# Altium PCB CanRadar_v1.PcbDoc
Units mil, origin at the board's own origin, x right, y up, seen from the top; angles counter-clockwise.
Board outline 3937.01 x 3937.01 mil, 2 copper layers (Top Layer, Bottom Layer); 50 components, 31 nets, 139 pads, 0 vias.
Unrouted connection lines stored in the file: 104.
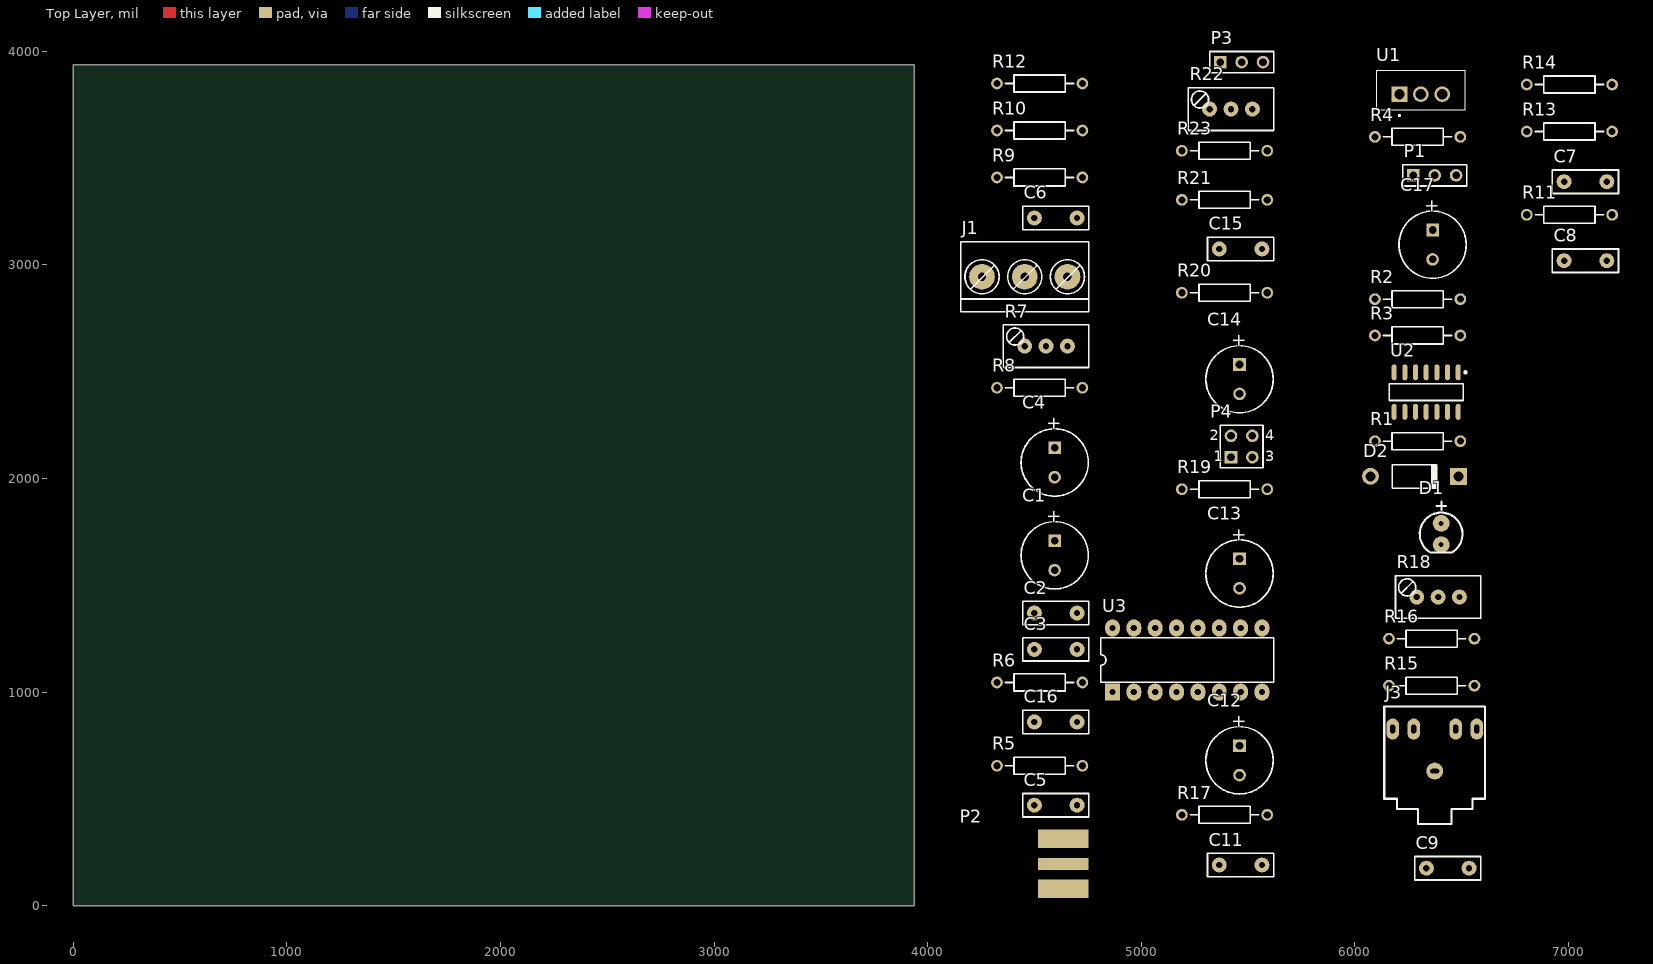
[diagram p0: Top Layer view]
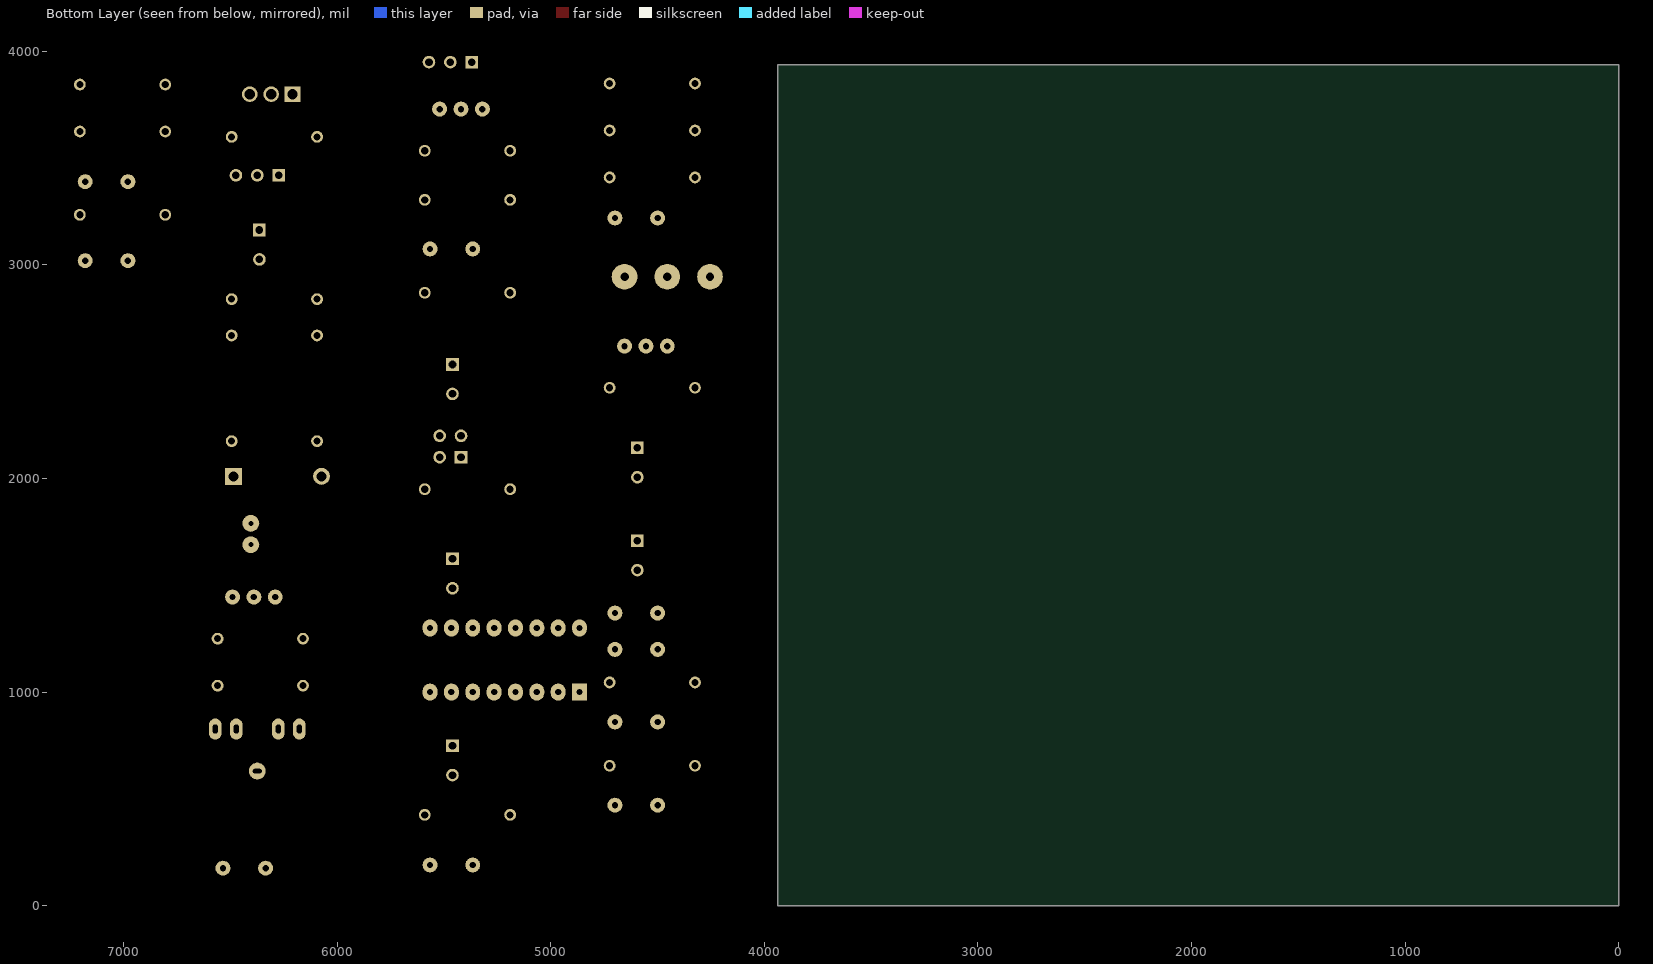
[diagram p1: Bottom Layer view, seen from below]

## Layer stack, top to bottom
Top Solder: solder mask 0.4, Solder Resist, Dk 3.5
Top Layer: signal copper 1.4
Dielectric 1: dielectric 12.6, FR-4, Dk 4.8
Bottom Layer: signal copper 1.4
Bottom Solder: solder mask 0.4, Solder Resist, Dk 3.5

## Board outline
0,0 3937.01,0 3937.01,3937.01 0,3937.01

## Design rules (kind name [scope] priority, off if disabled: settings)
Clearance [All] p1: gap=10 ignorepadtopadclearanceinfootprint=FALSE except(0: Arc-Hole Track-Hole SMDPad-Hole THPad-Hole Via-Hole Fill-Hole Poly-Hole Region-Hole Text-Hole)
PolygonConnect [All] p1: connectstyle=Relief reliefconductorwidth=10 reliefentries=4 polygonreliefangle="90 Angle" airgapwidth=10
RoomDefinition CanRadar_v1 [InComponentClass('CanRadar_v1')] p1: confinementstyle=ConfineIn formatcopy=TRUE lockcomponents=FALSE outline 4130,20 7250,20 7250,4015 4130,4015
RoutingVias [All] p1: holewidth=28 width=50 viastyle="Through Hole" minholewidth=28 minwidth=50 maxholewidth=28 maxwidth=50
SolderMaskExpansion [All] p1: expansion=4
Width [All] p1: maxlimit=10 minlimit=10 preferedwidth=10
30 further rules are at their usual default settings.

## Components (designator, comment, footprint, x,y, rotation, side; value= is the part's Value field where it differs from the comment)
C1 "Cap2" CAPPR3.5-8x11.5 4595,1640 r270 top value=10uF
C2 "Cap" RAD-0.2 4500,1370 r0 top value=100nF
C3 "Cap" RAD-0.2 4500,1200 r0 top value=10nF
C4 "Cap2" CAPPR3.5-8x11.5 4595,2075 r270 top value=1uF
C5 "Cap" RAD-0.2 4500,470 r0 top value=100nF
C6 "Cap" RAD-0.2 4500,3220 r0 top value=1nF
C7 "Cap" RAD-0.2 6980.9,3390 r0 top value=1nF
C8 "Cap" RAD-0.2 6980.9,3020 r0 top value=1nF
C9 "Cap" RAD-0.2 6335.9,175 r0 top value=1nF
C11 "Cap" RAD-0.2 5365.9,190 r0 top value=100nF
C12 "Cap2" CAPPR3.5-8x11.5 5460.9,680 r270 top value=10uF
C13 "Cap2" CAPPR3.5-8x11.5 5460.9,1555 r270 top value=1uF
C14 "Cap2" CAPPR3.5-8x11.5 5460.9,2465 r270 top value=10uF
C15 "Cap" RAD-0.2 5365.9,3075 r0 top value=470nF
C16 "Cap" RAD-0.2 4500,860 r0 top value=100nF
C17 "Cap2" CAPPR3.5-8x11.5 6365,3095 r270 top value=10uF
D1 "LED1" LED 6405,1790 r270 top
D2 "Diode 1N4001" DO-41 6280,2010 r0 top
J1 "Borne x 3" BORNE-3x0.2 4455,2945 r0 top
J3 "SJ1-3535N" "3.5mm Jack" 6375,630 r270 top
P1 "Header 3" HDR1X3 6275,3420 r0 top
P2 "SMA PCB 0.8mm" "SMA PCB 0.8mm" 4635,195 r0 top
P3 "Header 3" HDR1X3 5370.9,3950 r0 top
P4 "Header 2X2" HDR2X2 5420.9,2100 r0 top
R1 "Res2" AXIAL-0.4 6295,2175 r0 top value=1K
R2 "Res2" AXIAL-0.4 6295,2840 r0 top value=12K
R3 "Res2" AXIAL-0.4 6295,2670 r0 top value=1K
R4 "Res2" AXIAL-0.4 6295,3600 r0 top value=10K
R5 "Res2" AXIAL-0.4 4525,655 r0 top value=1.5K
R6 "Res2" AXIAL-0.4 4525,1045 r0 top value=1K
R7 "RPot" TRIMMER-V 4555,2620 r0 top value=10K
R8 "Res2" AXIAL-0.4 4525,2425 r0 top value=220
R9 "Res2" AXIAL-0.4 4525,3410 r0 top value=18K
R10 "Res2" AXIAL-0.4 4525,3630 r0 top value=3.9K
R11 "Res2" AXIAL-0.4 7005.9,3235 r0 top value=27K
R12 "Res2" AXIAL-0.4 4525,3850 r0 top value=100K
R13 "Res2" AXIAL-0.4 7005.9,3625 r0 top value=6.8K
R14 "Res2" AXIAL-0.4 7005.9,3845 r0 top value=8.2K
R15 "Res2" AXIAL-0.4 6360.9,1030 r0 top value=47K
R16 "Res2" AXIAL-0.4 6360.9,1250 r0 top value=5.1K
R17 "Res2" AXIAL-0.4 5390.9,425 r0 top value=5.1K
R18 "RPot" TRIMMER-V 6390.9,1445 r0 top value=50K
R19 "Res2" AXIAL-0.4 5390.9,1950 r0 top value=100K
R20 "Res2" AXIAL-0.4 5390.9,2870 r0 top value=100K
R21 "Res2" AXIAL-0.4 5390.9,3305 r0 top value=1K
R22 "RPot" TRIMMER-V 5420.9,3730 r0 top value=2M
R23 "Res2" AXIAL-0.4 5390.9,3535 r0 top value=10K
U1 "LM2940CT-5.0" TO254P1054X470X1955-3 6310,3800 r0 top
U2 "MAX414CPD" NSO14_L 6335,2405 r270 top
U3 "XR2206/11/12EB" DIP-16 4865.9,1000 r0 top

## Footprints (in the part's own frame and the unit in brackets; to place one, negate y for a bottom-side part, rotate by r counter-clockwise, add the part's x,y. Pads: shape width x height; smd on the part's side, far side on the other; paste and mask are expansions set on the pad)
"3.5mm Jack" [mm] "stereo jack 3.5mm"
  round 2 hole 0.5 slot 1.05 at 90 deg: 1(0,0)
  oval 2.5x1.5 hole 0.6 slot 1.05 at 0 deg: 2(-5,5) 3(-5,2.5) 4(-5,-2.5) 5(-5,-5)
  silkscreen extent -7.7,-6 6.3,6, body extent -7.45,-5.98 6.55,6.02, height 6.5
AXIAL-0.4 [mm]
  round 1.4 hole 0.85: 1(-5.08,0) 2(5.08,0)
  silkscreen extent -4.06,-1.02 4.06,1.02
BORNE-3x0.2 [mil] "Triple borne para circuito impreso a tornillo, Pitch: 200mil (5.08mm), Largo cuerpo: 327mil (8.3mm)"
  round 120 hole 39.37: 1(-200,0) 2(0,0) 3(200,0)
  silkscreen extent -300,-164 300,164
CAPPR3.5-8x11.5 [mm]
  rect 1.5x1.5 hole 0.9: 1(-1.75,0)
  round 1.5 hole 0.9: 2(1.75,0)
  silkscreen extent -4,-4 4,4
DIP-16 [mil] "Dual In-line Package, 16 pines, Ancho cuerpo: 300mil (7.62 mm),  Pitch: 100mil (2.54 mm)"
  rect 70x80 hole 29.53: 1(0,0)
  oval 70x80 hole 29.53: 2(100,0) 3(200,0) 4(300,0) 5(400,0) 6(500,0) 7(600,0) 8(700,0) 9(700,300) 10(600,300) 11(500,300) 12(400,300) 13(300,300) 14(200,300) 15(100,300) 16(0,300)
  silkscreen extent -56,46 756,254
DO-41 [mm]
  round 2 hole 1.2: 1(-5.23,0)
  rect 2x2 hole 1.2: 2(5.23,0)
  silkscreen extent -2.65,-1.4 2.75,1.4
HDR1X3 [mm]
  rect 1.5x1.5 hole 0.9: 1(0,0)
  round 1.5 hole 0.9: 2(2.54,0) 3(5.08,0)
  silkscreen extent -1.27,-1.27 6.35,1.27
HDR2X2 [mm]
  rect 1.5x1.5 hole 0.9: 1(0,0)
  round 1.5 hole 0.9: 2(0,2.54) 3(2.54,0) 4(2.54,2.54)
  silkscreen extent -1.27,-1.27 3.81,3.81
LED [mm]
  round 2 hole 0.6: 1(0,0) 2(2.54,0)
  silkscreen extent -2.59,-2.54 3.47,2.54, body extent -1.7,-2.91 3.72,3.11, height 8.81
NSO14_L [mm] "SOIC, 14-Leads, Body 8.7x3.9mm, Pitch 1.27mm, IPC High Density"
  oval 1.9x0.6 smd: 1(-2.35,3.81) 2(-2.35,2.54) 3(-2.35,1.27) 4(-2.35,0) 5(-2.35,-1.27) 6(-2.35,-2.54) 7(-2.35,-3.81) 8(2.35,-3.81) 9(2.35,-2.54) 10(2.35,-1.27) 11(2.35,0) 12(2.35,1.27) 13(2.35,2.54) 14(2.35,3.81)
  silkscreen extent -2.47,-4.4 1,4.79, body extent -2,-4.38 2,4.38, height 1.75
RAD-0.2 [mil]
  round 70 hole 29.53: 1(0,0) 2(200,0)
  silkscreen extent -55,-55 255,55
"SMA PCB 0.8mm" [mm]
  rect 6x1.4 smd: 1(0,0)
  rect 6x2.2 smd: 2(0,-2.975) 2(0,2.975)
  body extent -12.55,-3.18 0.75,3.18, height 22.91
TO254P1054X470X1955-3 [mm]
  rect 1.86x1.86 hole 1.24: 1(-2.54,0)
  round 1.86 hole 1.24: 2(0,0) 3(2.54,0)
  silkscreen extent -5.27,-2.64 5.27,2.86
TRIMMER-V [mil] "Ajuste vertical, Largo: 400mil (10.16mm), Ancho: 200mil (5.08mm)"
  round 70 hole 29.53: 1(-100,0) 2(0,0) 3(100,0)
  silkscreen extent -200,-100 200,100, body extent -190,-93 187,102, height 379

## Part data
C1 C2 C3 C4 C5 C6 C7 C8 C9 C11 C12 C13 C14 C15 C16 C17: "Capacitor", Publisher="Altium Limited"
  C1 C4 C12 C13 C14 C17: PackageDescription="Capacitor; 2 Leads", PackageReference=CAPPR3.5-8x11.5, Published=23-Sep-2002
  C2 C3 C5 C6 C7 C8 C9 C11 C15 C16: LatestRevisionDate=17-Jul-2002, LatestRevisionNote="Re-released for DXP Platform.", PackageDescription="Radial Cap, Thru-Hole; 2 Leads; 0.3 in Pin Spacing", PackageReference=RAD-0.2, Published=8-Jun-2000
D1: "Typical RED GaAs LED", LatestRevisionDate=08-Jul-2005, LatestRevisionNote="Mech Layer 1 removed.", PackageDescription="LED; 2 Leads", PackageReference=LED-1, Published=8-Jun-2000, Publisher="Altium Limited"
D2: "1 Amp General Purpose Rectifier", Code_JEDEC=DO-204-AL, ComponentLink1Description="Manufacturer Link", ComponentLink1URL=http://www.fairchildsemi.com/, ComponentLink2Description=Datasheet, ComponentLink2URL=http://www.fairchildsemi.com/ds/1N%2F1N4001.pdf, DatasheetVersion=1998, LatestRevisionDate=17-Jul-2002, LatestRevisionNote="Re-released for DXP Platform.", PackageDescription="Diode, Axial; Body 5.2 x 2.7 mm (LxDia. max), Lead Dia. 0.86 mm (max)", PackageReference=DO-41, PackageVersion=Aug-1999, Published=8-Jun-2000, Publisher="Altium Limited"
J1: "Triple borne para circuito impreso"
J3: "3.5 mm, Stereo, Right Angle, Through Hole, Audio Jack Connector", Package=None, Availability=Unavailable, CUI_purchase_URL=https://www.cuidevices.com/product/interconnect/connectors/audio-connectors/jacks/sj1-353xn-series?utm_source=snapeda.com&utm_medium=referral&utm_campaign=snapedaBOM, MF="CUI Devices", MP=SJ1-3535N, Price=None, SnapEDA_Link=https://www.snapeda.com/parts/SJ1-3535N/CUI%20Devices/view-part/533084/?ref=snap
P1 P3: "Header, 3-Pin", LatestRevisionDate=17-Jul-2002, LatestRevisionNote="Re-released for DXP Platform.", Publisher="Altium Limited"
P4: "Header, 2-Pin, Dual row", LatestRevisionDate=17-Jul-2002, LatestRevisionNote="Re-released for DXP Platform.", Publisher="Altium Limited"
R1 R2 R3 R4 R5 R6 R8 R9 R10 R11 R12 R13 R14 R15 R16 R17 R19 R20 R21 R23: "Resistor", LatestRevisionDate=17-Jul-2002, LatestRevisionNote="Re-released for DXP Platform.", PackageDescription="Axial Device, Thru-Hole; 2 Leads; 0.4 in Pin Spacing", PackageReference=AXIAL-0.4, Published=8-Jun-2000, Publisher="Altium Limited"
R7 R18 R22: "Potentiometer", LatestRevisionDate=17-Jul-2002, LatestRevisionNote="Re-released for DXP Platform.", PackageDescription="Variable Resistor, Thru-Hole; 3 Leads", PackageReference=VR5, Published=8-Jun-2000, Publisher="Altium Limited", Set Position=0.5, Sim Note="Enter the Resistance value and the set point into parameter fields."
U1: "1-A, 26-V, high-PSRR, low-dropout voltage regulator 3-TO-220 0 to 125", Package="TO-220-3 Texas Instruments", Availability=Warning, BuyPart=https://www.snapeda.com/parts/LM2940CT-5.0/Texas%20Instruments/view-part/213981/?ref=eda, DigiKey-Purchase-URL=https://snapeda.com/shop?store=DigiKey&id=213981, MF="Texas Instruments", Mouser-Purchase-URL=https://snapeda.com/shop?store=Mouser&id=213981, MP=LM2940CT-5.0, Price=None, SnapEDA_Link=https://www.snapeda.com/parts/LM2940CT-5.0/Texas%20Instruments/view-part/213981/?ref=snap
U2: Package=None, Availability=Unavailable, MP=MAX414CPD, Price=None
U3: "XR2206, XR2211, XR2212 Multi-Purpose Timing Evaluation Board", Package="TSSOP-20 Exar", Digi-Key_Part_Number=1016-1428-ND, Digi-Key_Purchase_URL=https://www.digikey.com/product-detail/en/maxlinear-inc/XR2206-11-12EB/1016-1428-ND/2636661?utm_source=snapeda&utm_medium=aggregator&utm_campaign=symbol, MF="MaxLinear, Inc.", MP=XR2206/11/12EB, SnapEDA_Link=https://www.snapeda.com/parts/XR2206/11/12EB/MaxLinear%2C%20Inc./view-part/230277/?ref=snap

## Nets (pads, with @x,y where several pads share a name; then routed paths per layer and width w, separated by ;. In a path a pad name is that pad's centre, name@x,y a point inside that pad or via, vN(x,y) a via of type N, cw(c..) or ccw(c..) an arc to the next point about the centre after c; other vN are vias at no path point)
+5: C3.1 C4.1 C7.2 C8.1 R2.1 R4.2 R5.1 R8.1 R11.1 R12.2 R19.2 R23.1 U1.3
+12: C11.2 C16.1 C17.1 D2.2 P1.1 R1.2 R16.1 U2.4 U3.4
GND: C1.2 C2.2 C3.2 C4.2 C11.1 C12.2 C13.2 C16.2 C17.2 D1.2 J1.3 J3.1 P2.2 P3.1 P4.2 P4.4 R17.2 R20.1 R22.2 R22.3 U1.2 U2.11 U2.12 U2.13 U3.1 U3.9 U3.12 U3.13 U3.14 U3.15 U3.16
INA+: C8.2 R13.2 U2.3
NetC1_2: C1.1 C2.1 P1.2 U1.1
NetC5_1: C5.1 R4.1 U2.10
NetC5_2: C5.2 P2.1
NetC6_1: C6.1 R6.2 R15.1 U2.7
NetC6_2: C6.2 R9.2 R10.1 R11.2
NetC7_1: C7.1 R10.2 U2.5
NetC9_1: C9.1 R12.1 R13.1 R14.1
NetC12_2: C12.1 R16.2 R17.1 R18.1
NetC13_2: C13.1 U3.10
NetC14_1: C14.2 U3.2
NetC14_2: C14.1 P4.1 P4.3 R19.1 R20.2
NetC15_1: C15.1 U3.5
NetC15_2: C15.2 U3.6
NetD1_1: D1.1 R1.1
NetD2_1: D2.1 J1.1
NetJ1_2: J1.2 P1.3
NetJ3_2: J3.2 P3.2
NetJ3_3: J3.3 R15.2
NetP3_3: P3.3 R23.2 U3.11
NetR2_2: R2.2 R3.1 U2.2
NetR5_2: R5.2 R6.1 U2.6
NetR7_1: R7.1 R7.3 R14.2 U2.8
NetR7_2: R7.2 R8.2 U2.9
NetR18_2: R18.2 R18.3 U3.3
NetR21_1: R21.1 R22.1
NetR21_2: R21.2 U3.7
Out1: C9.2 R3.2 R9.1 U2.1
pads on no net: J3.4 J3.5 U2.14 U3.8

## Text inside footprints (layer, text, board x,y; h text height)
C1: Top Overlay "+" at 4565.47,1855.55 h59.06 r270
C4: Top Overlay "+" at 4565.47,2290.55 h59.06 r270
C12: Top Overlay "+" at 5431.38,895.55 h59.06 r270
C13: Top Overlay "+" at 5431.38,1770.55 h59.06 r270
C14: Top Overlay "+" at 5431.38,2680.55 h59.06 r270
C17: Top Overlay "+" at 6335.47,3310.55 h59.06 r270
P4: Top Overlay "1" at 5340.9,2080 h50; Top Overlay "2" at 5320.9,2180 h50; Top Overlay "4" at 5580.9,2180 h50; Top Overlay "3" at 5580.9,2080 h50